# Altium PCB 基于STM32的DDS信号源的设计实例.PcbDoc
Units mm, origin at the board's own origin, x right, y up, seen from the top; angles counter-clockwise.
Board outline 100 x 70 mm, 2 copper layers (Top Layer, Bottom Layer); 62 components, 54 nets, 257 pads, 0 vias.
Unrouted connection lines stored in the file: 164.
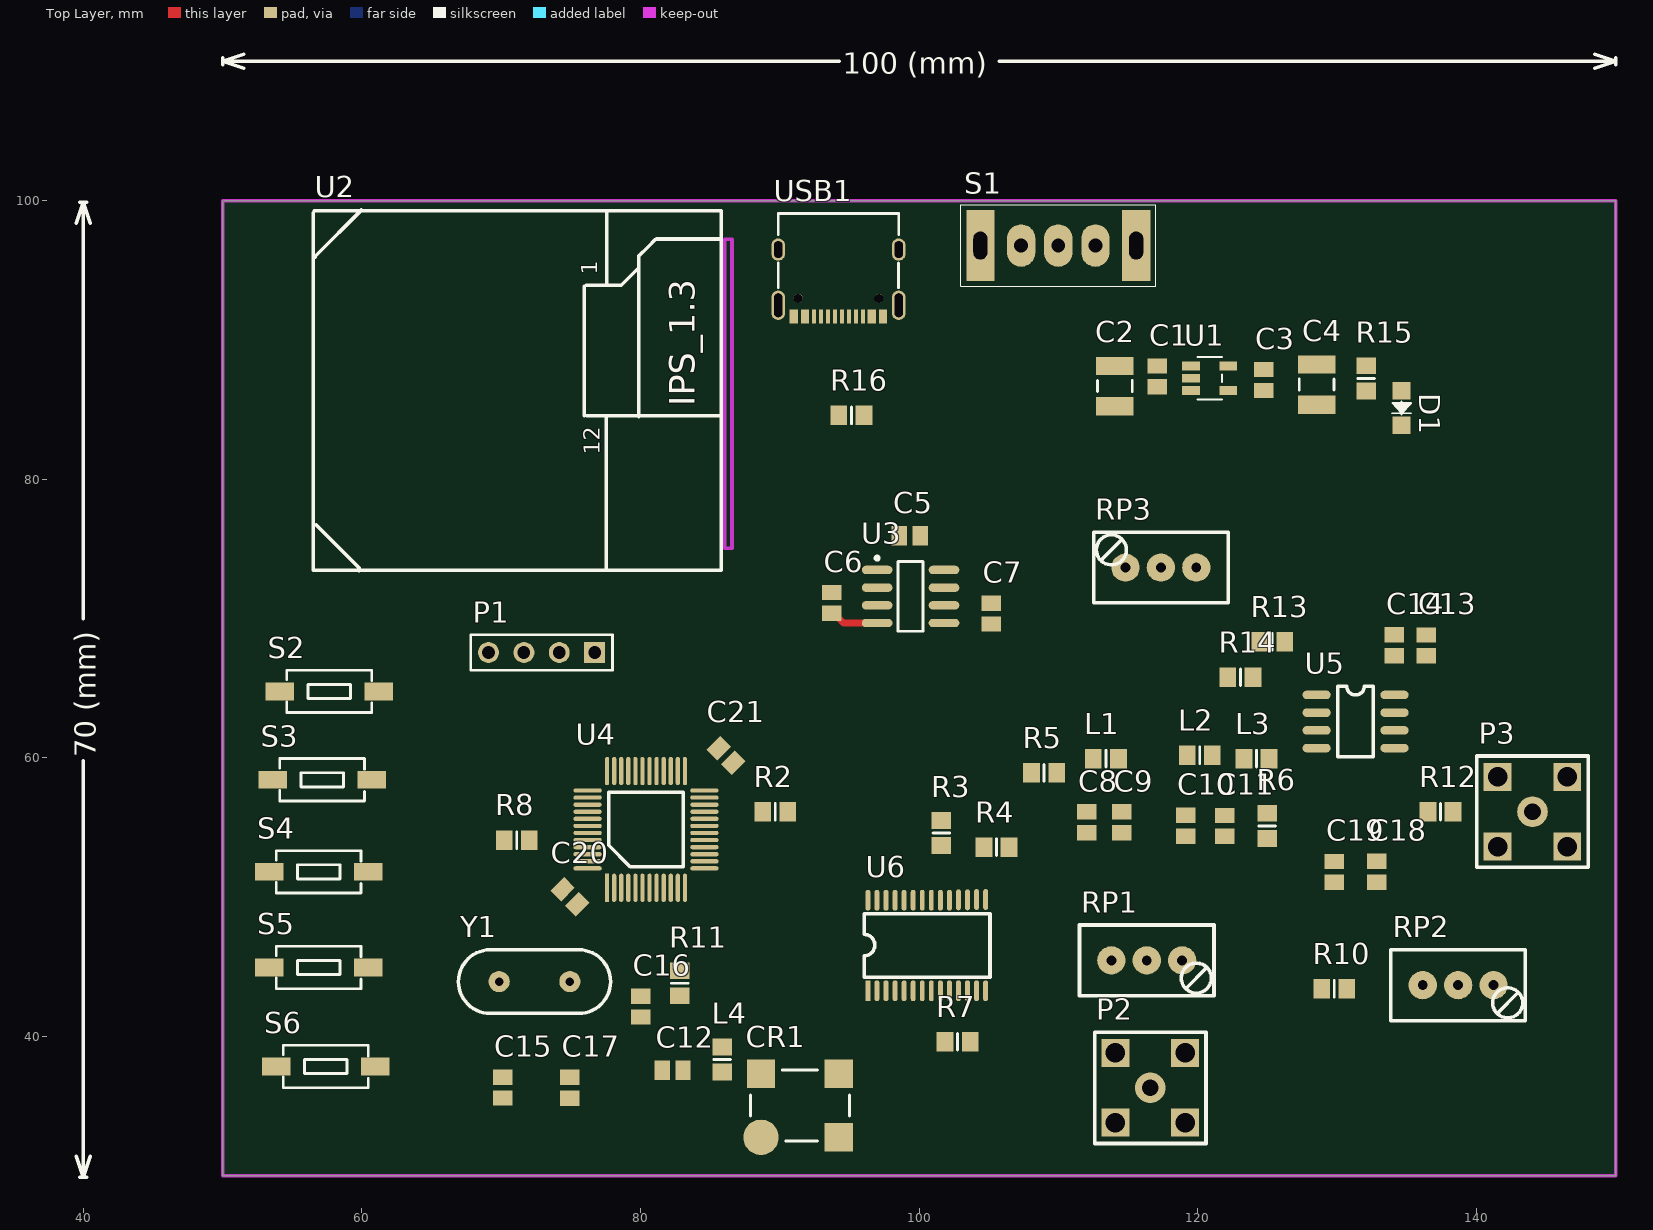
[diagram p0: Top Layer view]
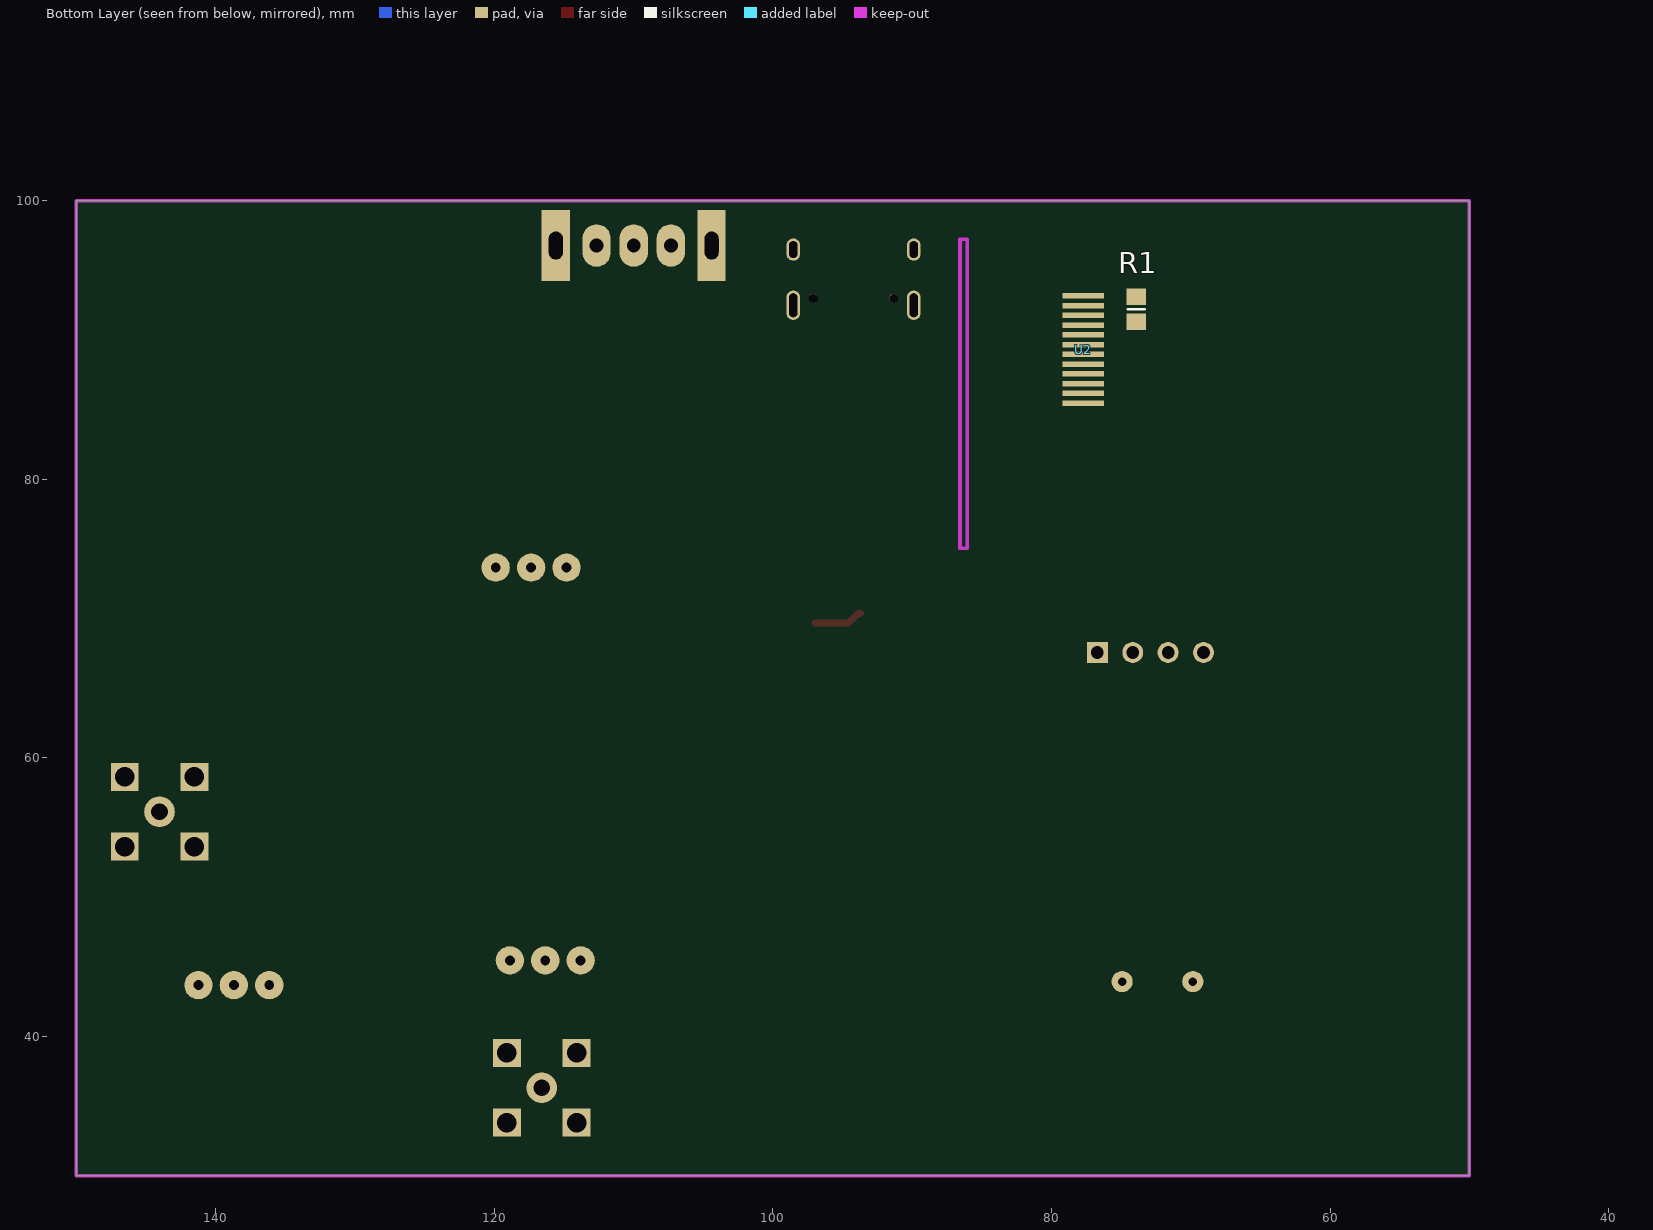
[diagram p1: Bottom Layer view, seen from below]

## Layer stack, top to bottom
Top Solder: solder mask 0.0102, Solder Resist, Dk 3.5
Top Layer: signal copper 0.0356
Dielectric 1: dielectric 0.32, FR-4, Dk 4.8
Bottom Layer: signal copper 0.0356
Bottom Solder: solder mask 0.0102, Solder Resist, Dk 3.5

## Board outline
50,30 150,30 150,100 50,100

## Design rules (kind name [scope] priority, off if disabled: settings)
Clearance [All] p1: gap=0.203 ignorepadtopadclearanceinfootprint=FALSE
PolygonConnect [All] p1: connectstyle=Relief reliefconductorwidth=0.254 reliefentries=4 polygonreliefangle="90 Angle" airgapwidth=0.254
RoutingVias [All] p1: holewidth=0.711 width=1.27 viastyle="Through Hole" minholewidth=0.711 minwidth=1.27 maxholewidth=0.711 maxwidth=1.27
SolderMaskExpansion [All] p1: expansion=0.102 istentingtop=FALSE
Width [All] p1: maxlimit=2.54 minlimit=0.254 preferedwidth=0.254 minimp=50.000000 maximp=50.000000 favimp=50.000000
30 further rules are at their usual default settings.

## Components (designator, comment, footprint, x,y, rotation, side; value= is the part's Value field where it differs from the comment)
C1 "Cap" C0805 117.094,87.376 r90 top
C2 "Cap Pol1" C1210_N 114.046,86.688 r270 top
C3 "Cap" C0805 124.714,87.122 r90 top
C4 "Cap Pol1" C1210_N 128.524,86.794 r270 top
C5 "Cap" C0805 99.314,75.946 r180 top
C6 "Cap" C0805 93.726,71.12 r90 top
C7 "Cap" C0805 105.156,70.358 r90 top
C8 "Cap" C0805 112.014,55.372 r90 top
C9 "Cap" C0805 114.554,55.372 r90 top
C10 "Cap" C0805 119.126,55.13 r90 top
C11 "Cap" C0805 121.92,55.118 r90 top
C12 "Cap" C0805 82.296,37.592 r180 top
C13 "Cap" C0805 136.398,68.072 r90 top
C14 "Cap" C0805 134.112,68.084 r90 top
C15 "Cap" C0805 70.104,36.334 r90 top
C16 "Cap" C0805 80.01,42.152 r90 top
C17 "Cap" C0805 74.93,36.322 r90 top
C18 "Cap" C0805 132.842,51.828 r270 top
C19 "Cap" C0805 129.794,51.816 r270 top
C20 "Cap" C0805 74.93,50.038 r315 top
C21 "Cap" C0805 86.128,60.176 r135 top
CR1 "30MHZ" CRYSTAL-SMT-5X7 88.646,32.766 r0 top
D1 "LED2" D0805+ 134.62,86.36 r270 top
L1 "Inductor" 6-0805_N 113.4,59.944 r0 top
L2 "Inductor" 6-0805_N 120.142,60.198 r180 top
L3 "Inductor" 6-0805_N 124.206,59.944 r0 top
L4 "Inductor" 6-0805_N 85.852,38.354 r90 top
P1 "Header 4" HDR1X4 76.708,67.564 r180 top
P2 "SMA" SMA-KE 116.586,36.322 r0 top
P3 "SMA" SMA-KE 144.018,56.134 r0 top
R1 "Res2" 6-0805_N 73.914,92.202 r270 bottom
R2 "Res2" 6-0805_N 89.662,56.134 r0 top
R3 "Res2" 6-0805_N 101.6,54.61 r270 top
R4 "Res2" 6-0805_N 105.548,53.594 r0 top
R5 "Res2" 6-0805_N 108.966,58.928 r0 top
R6 "Res2" 6-0805_N 124.968,55.118 r90 top
R7 "Res2" 6-0805_N 102.754,39.624 r0 top
R8 "Res2" 6-0805_N 71.12,54.102 r0 top
R10 "Res2" 6-0805_N 129.794,43.434 r0 top
R11 "Res2" 6-0805_N 82.804,43.826 r90 top
R12 "Res2" 6-0805_N 137.414,56.134 r0 top
R13 "Res2" 6-0805_N 125.338,68.326 r180 top
R14 "Res2" 6-0805_N 123.052,65.786 r0 top
R15 "Res2" 6-0805_N 132.08,87.238 r90 top
R16 "Res2" 6-0805_N 95.134,84.582 r180 top
RP1 "POT2" VR7 116.332,45.466 r0 top (schematic designator RP?)
RP2 "POT2" VR7 138.684,43.688 r0 top
RP3 "POT2" VR7 117.348,73.66 r180 top
S1 "SW SPDT" SW 115.062,96.774 r180 top
S2 "KEY" SW-MINI 54.61,64.77 r0 top
S3 "KEY" SW-MINI 54.102,58.42 r0 top
S4 "KEY" SW-MINI 53.848,51.816 r0 top
S5 "KEY" SW-MINI 53.848,44.958 r0 top
S6 "KEY" SW-MINI 54.356,37.846 r0 top
U1 "XC6219B332" SOT23-5L 119.507,87.249 r270 top
U2 "1.3寸TFT液晶" 1.3-TFT-TPS 77.716,93.165 r0 top
U3 "ICL7660" SO8_N 99.378,71.585 r0 top
U4 "STM32F103C8" TQFP-48 77.597,50.673 r90 top
U5 "OPA2690" SO-8 128.524,64.516 r0 top
U6 "AD9851" TSSOP28 96.318,43.284 r90 top
USB1 "TYPE-C" TYPE-C 89.881,96.484 r0 top
Y1 "XTAL" XTAL2 72.39,43.942 r180 top

## Footprints (in the part's own frame and the unit in brackets; to place one, negate y for a bottom-side part, rotate by r counter-clockwise, add the part's x,y. Pads: shape width x height; smd on the part's side, far side on the other; paste and mask are expansions set on the pad)
1.3-TFT-TPS [mm]
  rect 3x0.4 smd far side: 1(0,0) 2(0.008,-0.709) 3(0.008,-1.409) 4(0.008,-2.109) 5(0.008,-2.809) 6(0.008,-3.509) 7(0.008,-4.209) 8(0.008,-4.909) 9(0.008,-5.609) 10(0.008,-6.309) 11(0.008,-7.009) 12(0.008,-7.709)
  Keep-Out Layer lines w0.254: 8.339,-18.123 8.339,4.051 8.847,4.051 8.847,-18.123 8.339,-18.123
  silkscreen extent -21.22,-19.72 8.06,6.16
6-0805_N [mm] "Chip Resistor, Body 2.0x1.2mm, IPC Medium Density"
  rect 1.2x1.4 smd: 1(-0.9,0) 2(0.9,0)
  silkscreen extent 0,-0.6 0,0.6, body extent -1.07,-0.7 1.07,0.7, height 0.7
C0805 [mm] "Chip Capacitor, Body 2.0x1.3mm, IPC High Density"
  rect 1.1x1.4 smd: 1(-0.75,0) 2(0.75,0)
  body extent -1.1,-0.72 1.1,0.72, height 1.4
C1210_N [mm] "Chip Capacitor, Body 3.2x2.5mm, IPC Medium Density"
  rect 1.3x2.7 smd: 1(-1.45,0) 2(1.45,0)
  silkscreen extent -0.4,-1.25 0.4,1.25, body extent -1.7,-1.35 1.7,1.35, height 1.5
CRYSTAL-SMT-5X7 [mil]
  round 100 smd: 1(0,0)
  rect 80x80 smd: 4(220,0) 5(220,180) 8(0,180)
  silkscreen extent -30,-10 250,190
D0805+ [mil]
  rect 50x50 smd: A(0,0) K(98,0)
  silkscreen extent 31,-27 68,27
HDR1X4 [mm] "Connector; Header; 4 Position"
  rect 1.5x1.5 hole 0.9: 1(0,0)
  round 1.5 hole 0.9: 2(2.54,0) 3(5.08,0) 4(7.62,0)
  silkscreen extent -1.27,-1.27 8.89,1.27
SMA-KE [mm]
  round 2.2 hole 1.2: 1(0,0)
  rect 2x2 hole 1.4: 2(2.5,2.5) 3(2.5,-2.5) 4(-2.5,-2.5) 5(-2.5,2.5)
  silkscreen extent -4,-4 4,4
SO8_N [mm] "SOIC, 8-Leads, Body 4.9x3.9mm, Pitch 1.27mm, IPC Medium Density"
  oval 2.2x0.6 smd: 1(-2.4,1.905) 2(-2.4,0.635) 3(-2.4,-0.635) 4(-2.4,-1.905) 5(2.4,-1.905) 6(2.4,-0.635) 7(2.4,0.635) 8(2.4,1.905)
  silkscreen extent -2.52,-2.5 0.9,2.88, body extent -2,-2.5 2,2.5, height 1.75
SO-8 [mil]
  oval 80x24 smd: 1(0,0) 2(0,-50) 3(0,-100) 4(0,-150) 5(220,-150) 6(220,-100) 7(220,-50) 8(220,0)
  silkscreen extent 60,-175 160,25
SOT23-5L [mil]
  rect 25x50 smd: 1(-35,0) 2(0,0) 3(35,0) 4(35,105) 5(-35,105)
  silkscreen extent -60,18 60,88
SW [mil]
  rect 80x200 hole 39.37 slot 78.74 at 90 deg: 0(-20,0) 0(420,0)
  oval 80x120 hole 39.37: 1(200,0) 2(95,0) 3(305,0)
  silkscreen extent -75,-115 475,115
SW-MINI [mil]
  rect 80x50 smd: 1(-20,0) 2(260,0)
  silkscreen extent 0,-60 240,60
TQFP-48 [mil]
  rect 80x12 smd: 1(0,0)
  oval 80x12 smd: 2(0,-20) 3(0,-40) 4(0,-60) 5(0,-80) 6(0,-100) 7(0,-120) 8(0,-140) 9(0,-160) 10(0,-180) 11(0,-200) 12(0,-220) 25(330,-220) 26(330,-200) 27(330,-180) 28(330,-160) 29(330,-140) 30(330,-120) 31(330,-100) 32(330,-80) 33(330,-60) 34(330,-40) 35(330,-20) 36(330,0)
  oval 12x80 smd: 13(55,-275) 14(75,-275) 15(95,-275) 16(115,-275) 17(135,-275) 18(155,-275) 19(175,-275) 20(195,-275) 21(215,-275) 22(235,-275) 23(255,-275) 24(275,-275) 37(275,55) 38(255,55) 39(235,55) 40(215,55) 41(195,55) 42(175,55) 43(155,55) 44(135,55) 45(115,55) 46(95,55) 47(75,55) 48(55,55)
  silkscreen extent 60,-215 270,-5
TSSOP28 [mm]
  rect 1.5x0.35 smd: 1(0,0)
  oval 1.5x0.35 smd: 2(0,-0.65) 3(0,-1.3) 4(0,-1.95) 5(0,-2.6) 6(0,-3.25) 7(0,-3.9) 8(0,-4.55) 9(0,-5.2) 10(0,-5.85) 11(0,-6.5) 12(0,-7.15) 13(0,-7.8) 14(0,-8.45) 15(6.55,-8.45) 16(6.55,-7.8) 17(6.525,-7.15) 18(6.525,-6.5) 19(6.5,-5.85) 20(6.5,-5.2) 21(6.5,-4.55) 22(6.5,-3.9) 23(6.5,-3.25) 24(6.5,-2.6) 25(6.5,-1.95) 26(6.5,-1.3) 27(6.5,-0.65) 28(6.5,0)
  silkscreen extent 0.98,-8.76 5.53,0.28
TYPE-C [mm]
  round 0.65 hole 0.65: 0(1.435,-3.5) 0(7.215,-3.5)
  oval 1x1.6 hole 0.6 slot 1.2 at 90 deg: 1(0,0) 2(8.65,0)
  oval 1x2.1 hole 0.6 slot 1.7 at 90 deg: 3(8.65,-4) 4(0,-4)
  rect 0.3x1 smd: A1(7.675,-4.79) A4(6.875,-4.79) A5(5.575,-4.79) A6(4.575,-4.79) A7(4.075,-4.79) A8(3.075,-4.79) A9(1.775,-4.79) A12(0.975,-4.79) B1(1.275,-4.79) B4(2.075,-4.79) B5(2.575,-4.79) B6(3.575,-4.79) B7(5.075,-4.79) B8(6.075,-4.79) B9(6.575,-4.79) B12(7.375,-4.79)
  silkscreen extent 0,-2.74 8.65,2.6
VR7 [mil]
  round 80 hole 28: 1(-100,0) 2(100,0) 3(0,0)
  silkscreen extent -190,-100 190,100
XTAL2 [mil]
  round 60 hole 24: 1(-100,0) 2(100,0)
  silkscreen extent -215,-90 215,90

## Part data
C1 C3 C5 C6 C7 C8 C9 C10 C11 C12 C13 C14 C15 C16 C17 C18 C19 C20 C21: "Capacitor", LatestRevisionDate=17-Jul-2002, LatestRevisionNote="Re-released for DXP Platform.", PackageDescription="Radial Cap, Thru-Hole; 2 Leads; 0.3 in Pin Spacing", PackageReference=RAD-0.3, Published=8-Jun-2000, Publisher="Altium Limited"
C2 C4: "Polarized Capacitor (Radial)", LatestRevisionDate=17-Jul-2002, LatestRevisionNote="Re-released for DXP Platform.", PackageDescription="Polarized Capacitor (Radial); 2 Leads", PackageReference=RB7.6-15, Published=8-Jun-2000, Publisher="Altium Limited"
CR1: library part CRYSTAL-DIP8
D1: "Typical RED, GREEN, YELLOW, AMBER GaAs LED", LatestRevisionDate=17-Jul-2002, LatestRevisionNote="Re-released for DXP Platform.", PackageDescription="SM LED; 2 Flat Leads", PackageReference=3.2X1.6X1.1, PackageVersion=Feb-2002, Published=8-Jun-2000, Publisher="Altium Limited"
P1: "Header, 4-Pin", LatestRevisionDate=17-Jul-2002, LatestRevisionNote="Re-released for DXP Platform.", Publisher="Altium Limited"
R1 R2 R3 R4 R5 R6 R7 R8 R10 R11 R12 R13 R14 R15 R16: "Resistor", LatestRevisionDate=17-Jul-2002, LatestRevisionNote="Re-released for DXP Platform.", PackageDescription="Axial Device, Thru-Hole; 2 Leads; 0.4 in Pin Spacing", PackageReference=AXIAL-0.4, Published=8-Jun-2000, Publisher="Altium Limited"
RP1 RP2 RP3: "Potentiometer"
S2 S3 S4 S5 S6: library part SW-PB, "Switch", LatestRevisionDate=17-Jul-2002, LatestRevisionNote="Re-released for DXP Platform.", PackageDescription="Switch; 2 Leads", PackageReference=SPST-2, Published=24-Mar-1999, Publisher="Altium Limited"
U1: library part XC6219
U4: "Flaah:64/RAM:20/IO:36", BOM名称=32位STM单片机, 学习资源=www.ooocke.com, 版权归属=源创客
Y1: "Crystal Oscillator", LatestRevisionDate=17-Jul-2002, LatestRevisionNote="Re-released for DXP Platform.", PackageDescription="Crystal, Thru-Hole; 2 Leads; Body 3.1 x 8.2 mm (Dia.xH)", PackageReference=R38, Published=8-Jun-2000, Publisher="Altium Limited"
L1 L2 L3 L4: Code_IEC=1005, Code_JEITA=0402, LatestRevisionDate=29-May-2009, LatestRevisionNote="IPC-7351 Footprint Added.", PackageDescription="Chip Inductor", PackageReference=0402-A, Published=8-Jun-2000, Publisher="Altium Limited"

## Nets (pads, with @x,y where several pads share a name; then routed paths per layer and width w, separated by ;. In a path a pad name is that pad's centre, name@x,y a point inside that pad or via, vN(x,y) a via of type N, cw(c..) or ccw(c..) an arc to the next point about the centre after c; other vN are vias at no path point)
+5: C1.2 C2.1 C5.1 C13.1 C14.1 L4.2 P1.1 R16.1 RP1.2 RP3.1 S1.2 U1.1 U1.3 U3.8 U5.8 U6.6 U6.11 U6.18 U6.23
+5VIN: S1.1 USB1.A4 USB1.A9 USB1.B4 USB1.B9
-5: C7.1 C18.1 C19.1 RP3.2 U3.5 U5.4
AD9850-D0: U4.10 U6.4
AD9850-D1: U4.11 U6.3
AD9850-D2: U4.12 U6.2
AD9850-D3: U4.13 U6.1
AD9850-D4: U4.14 U6.28
AD9850-D5: U4.15 U6.27
AD9850-D6: U4.16 U6.26
AD9850-D7: U4.17 U6.25
D/C: U2.7 U4.25
D\D\S\R\S\T\: R3.1 U4.19 U6.22
DDSFOUP: U4.21 U6.8
DDSWCLK: U4.18 U6.7
FOUT: C11.2 L3.2 R6.2 R13.1 U6.16
GND: C1.1 C2.2 C3.1 C4.2 C5.2 C7.2 C8.1 C9.1 C10.1 C11.1 C12.2 C13.2 C14.2 C15.1 C16.1 C17.1 C18.2 C19.2 C20.1 C21.1 CR1.4 D1.K P1.2 P2.2 P2.3 P2.4 P2.5 P3.2 P3.3 P3.4 P3.5 R1.1 R3.2 R4.1 R5.1 R6.1 R7.1 R8.2 RP1.1 S2.1 S3.1 S4.1 S5.1 S6.1 U1.2 U2.1 U2.5 U2.6 U2.8 U2.12 U3.3 U3.6 U4.8 U4.23 U4.35 U4.47 U6.5 U6.10 U6.19 U6.24 USB1.A1 USB1.A12 USB1.B1 USB1.B12
IOUTA: C8.2 L1.1 R5.2 U6.21
IOUTB: R4.2 U6.20
KEY1: S2.2 U4.41
KEY2: S3.2 U4.42
KEY3: S4.2 U4.43
KEY4: S5.2 U4.45
KEY5: S6.2 U4.46
NetC6_1: C6.1 U3.4 | length 3.5
  Top Layer w0.508: C6.1 93.876,70.37 94.566,69.68 U3.4
NetC6_2: C6.2 U3.2
NetC9_2: C9.2 L1.2 L2.1
NetC10_2: C10.2 L2.2 L3.1
NetC12_1: C12.1 CR1.8 L4.1
NetD1_A: D1.A R15.1
NetP2_1: P2.1 U6.14
NetP3_1: P3.1 R12.2
NetR1_2: R1.2 U2.2
NetR2_1: R2.1 U4.20
NetR7_2: R7.2 U6.12
NetR8_1: R8.1 U4.44
NetR10_2: R10.2 RP2.1
NetR12_1: R12.1 U5.7
NetR13_2: R13.2 R14.2 U5.2
NetR14_1: R14.1 RP3.3
NetRP2_2: RP2.2 RP2.3 U5.1
NetRP?_3: RP1.3 U6.15
NRST: C16.2 R11.1 U4.7
OSC-IN: C15.2 U4.5 Y1.2
OSC-OUT: C17.2 U4.6 Y1.1
R\E\S\: U2.11 U4.28
SCL: U2.9 U4.26
SCLK: P1.4 U4.37
SDA: U2.10 U4.27
SDIO: P1.3 U4.34
SYSCLK: CR1.5 U6.9
USB-D-N: U4.32 USB1.A7 USB1.B7
USB-D-P: R16.2 U4.33 USB1.A6 USB1.B6
VCC: C3.2 C4.1 C20.2 C21.2 R2.2 R11.2 R15.2 U1.5 U2.3 U2.4 U4.9 U4.24 U4.36 U4.48
pads on no net: CR1.1 R10.1 S1.0 S1.3 U1.4 U3.1 U3.7 U4.1 U4.2 U4.3 U4.4 U4.22 U4.29 U4.30 U4.31 U4.38 U4.39 U4.40 U5.3 U5.5 U5.6 U6.13 U6.17 USB1.0 USB1.1 USB1.2 USB1.3 USB1.4 USB1.A5 USB1.A8 USB1.B5 USB1.B8

## Keep-outs
Keep-Out Layer:
  the board outline again, w0.254

## Silkscreen, mask and mechanical layers (free items; w line width, h text height)
Top Overlay:
  lines w0.254: 39.492,31.42 40,29.896 ; 39.492,98.372 40,99.896 ; 39.746,29.896 40.254,29.896 ; 39.746,99.896 40.254,99.896 ; 40,59.792 40,29.896 ; 40,70 40,99.896 ; 40.508,31.42 40,29.896 ; 40.508,98.372 40,99.896 ; 50,109.746 50,110.254 ; 51.524,109.492 50,110 ; 51.524,110.508 50,110 ; 94.261,110 50,110 ; 105.739,110 150,110 ; 148.476,109.492 150,110 ; 148.476,110.508 150,110 ; 150,109.746 150,110.254
  text "100 (mm)" at 94.515,109.086 h1.52
  text "70 (mm)" at 40.914,60.046 h1.52 r90

## Text inside footprints (layer, text, board x,y; h text height)
U2: Top Overlay "12" at 77.064,81.748 h1.14 r90; Top Overlay "1" at 76.886,94.676 h1.14 r90; Top Overlay "IPS_1.3" at 83.896,85.227 h1.82 r90